# Altium PCB PCB_indheater.pcbdoc
Units mm, origin at the board's own origin, x right, y up, seen from the top; angles counter-clockwise.
Board outline 147.07 x 84.33 mm, 2 copper layers (Top Layer, Bottom Layer); 31 components, 12 nets, 68 pads, 7 vias.
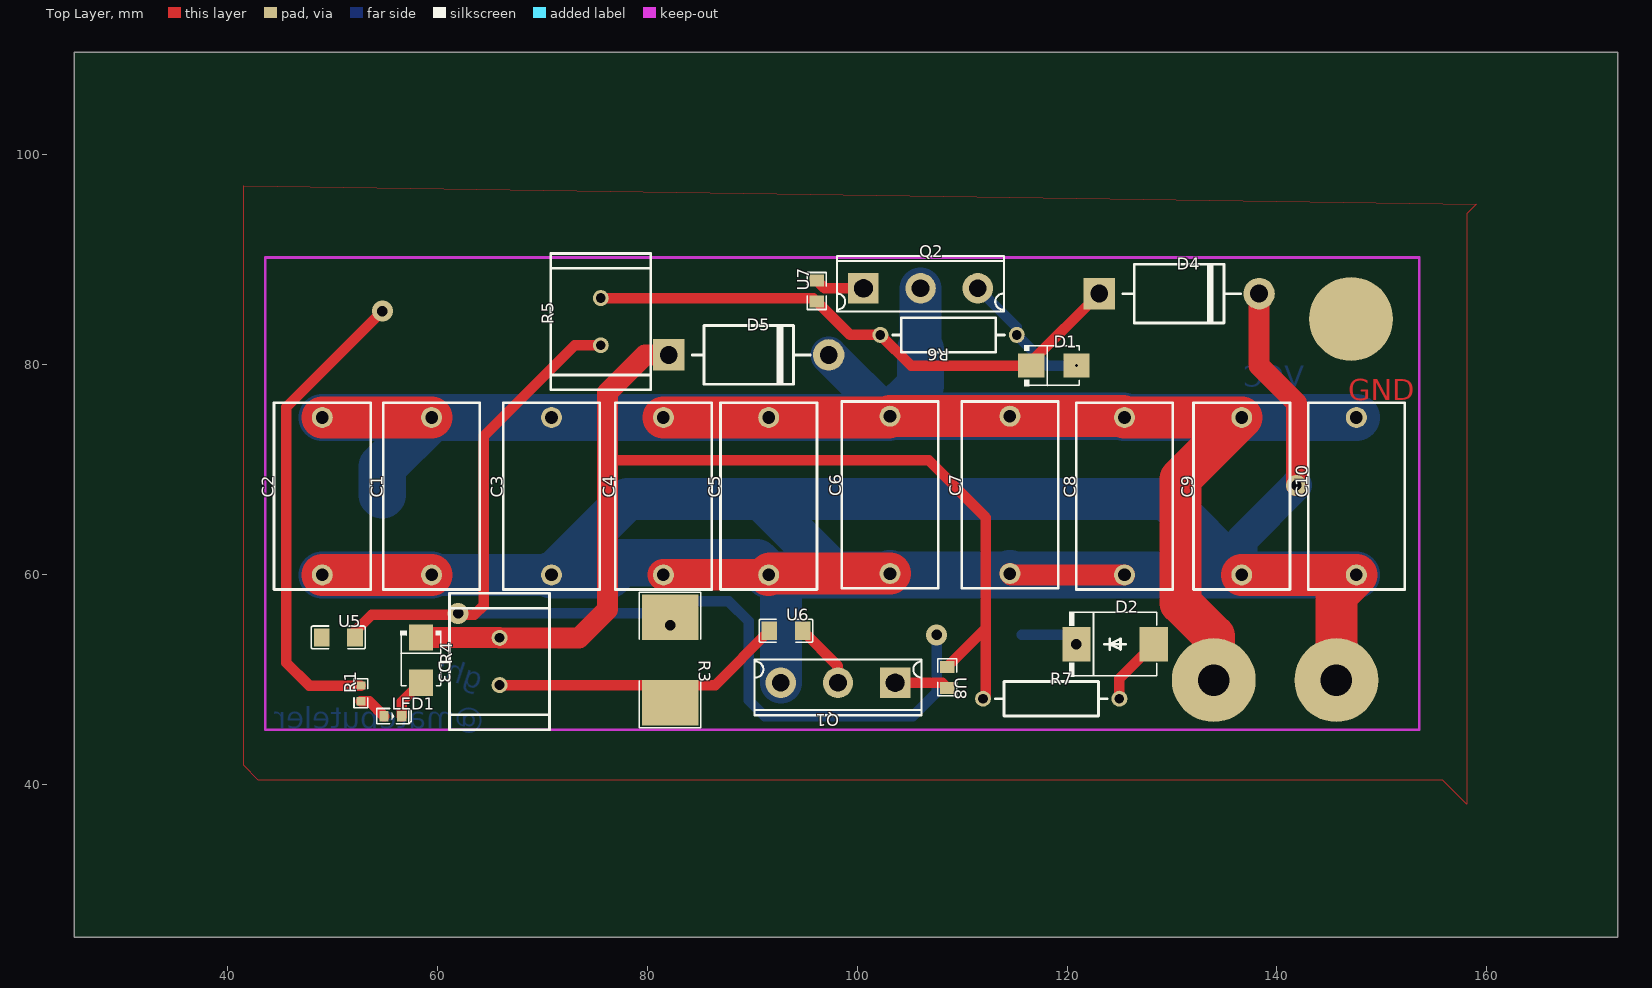
[diagram p0: Top Layer view]
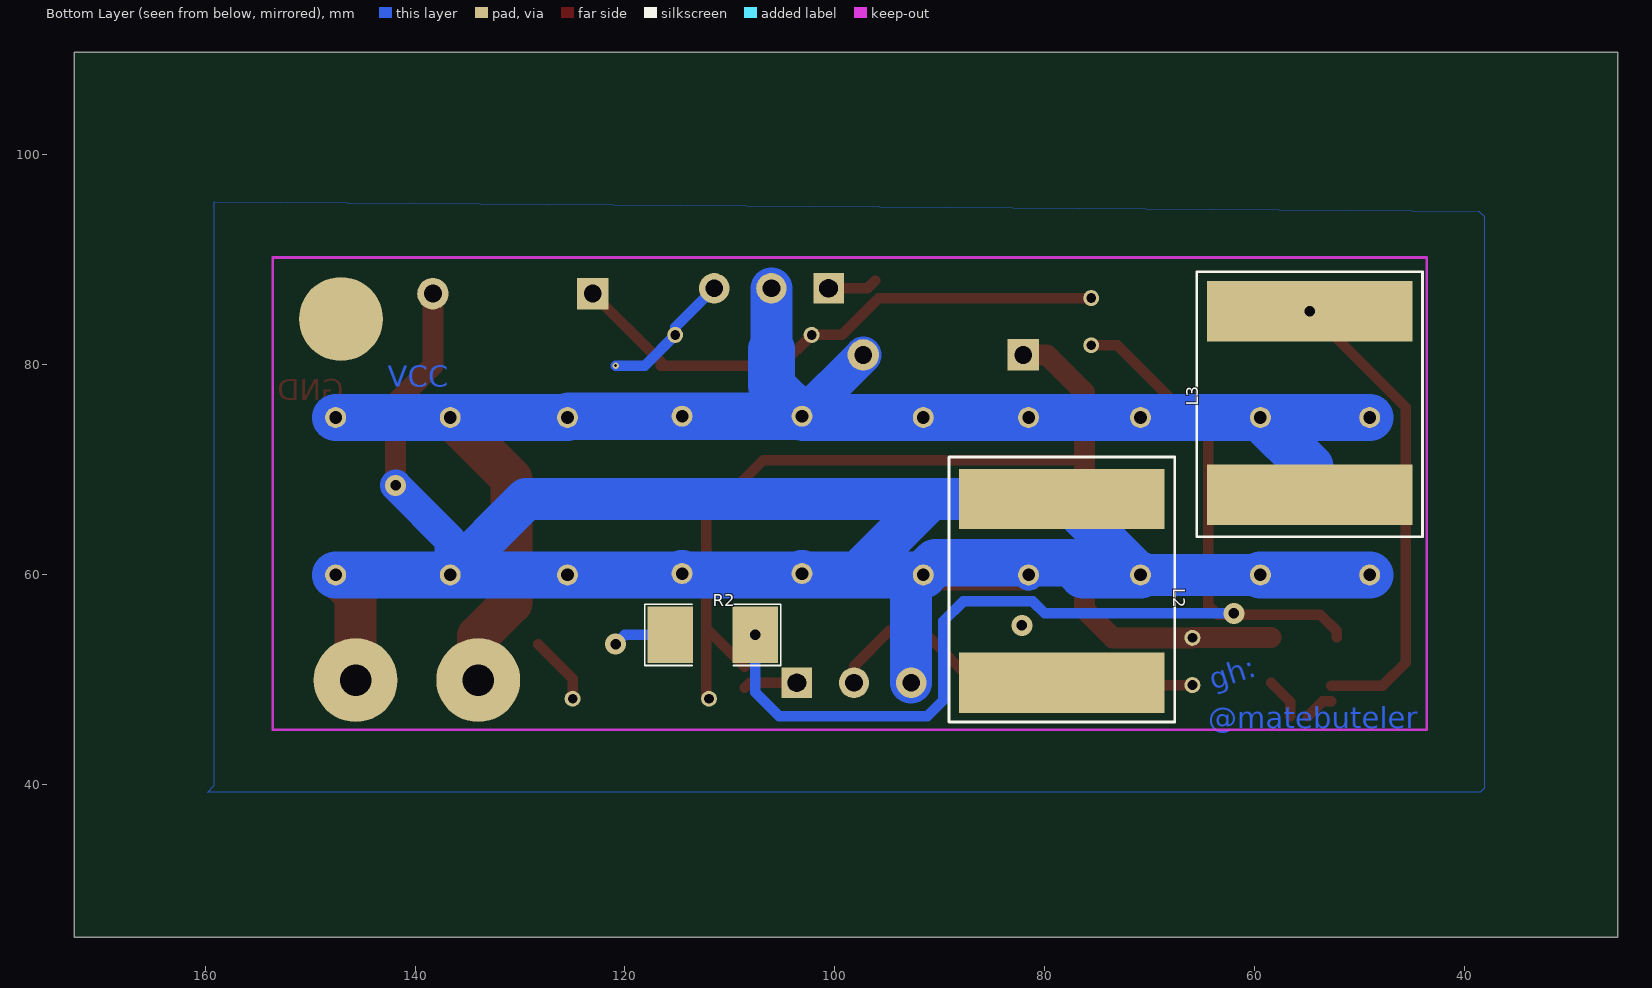
[diagram p1: Bottom Layer view, seen from below]

## Layer stack, top to bottom
Top Layer: signal copper (thickness not stored)
Dielectric: dielectric 0.32, FR-4, Dk 4.8
Bottom Layer: signal copper (thickness not stored)

## Board outline
172.466,25.4 25.4,25.4 25.4,109.728 172.466,109.728

## Components (designator, comment, footprint, x,y, rotation, side; value= is the part's Value field where it differs from the comment)
C1 "470n" CAP-TH_L17.8-W9.2-P15.00-D0.8 59.436,67.437 r90 top
C2 "470n" CAP-TH_L17.8-W9.2-P15.00-D0.8 49.022,67.437 r90 top
C3 "470n" CAP-TH_L17.8-W9.2-P15.00-D0.8 70.866,67.437 r90 top
C4 "470n" CAP-TH_L17.8-W9.2-P15.00-D0.8 81.534,67.437 r90 top
C5 "470n" CAP-TH_L17.8-W9.2-P15.00-D0.8 91.567,67.437 r90 top
C6 "470n" CAP-TH_L17.8-W9.2-P15.00-D0.8 103.124,67.564 r90 top
C7 "470n" CAP-TH_L17.8-W9.2-P15.00-D0.8 114.554,67.564 r90 top
C8 "470n" CAP-TH_L17.8-W9.2-P15.00-D0.8 125.476,67.437 r90 top
C9 "470n" CAP-TH_L17.8-W9.2-P15.00-D0.8 136.652,67.437 r90 top
C10 "470n" CAP-TH_L17.8-W9.2-P15.00-D0.8 147.574,67.437 r90 top
D1 "SMBJ5349B" SMB_L4.3-W3.6-LS5.2-RD 118.745,79.883 r0 top
D2 "MB510_R1_00001" SMC_L6.9-W5.9-LS7.9-RD 124.587,53.34 r0 top
D3 "SMBJ5349B" SMB_L4.3-W3.6-LS5.2-RD 58.42,51.816 r270 top
D4 "FR307_C140432" DO-201AD_BD5.3-L8.4-P12.50-D1.4-FD 130.683,86.741 r0 top
D5 "FR307_C140432" DO-201AD_BD5.3-L8.4-P12.50-D1.4-FD 89.662,80.899 r0 top
L2 "FXL2213-101-M 100uH" FXL2213-101-M 78.359,58.42 r90 bottom
L3 "FXL2213-101-M 100uH" FXL2213-101-M 54.737,76.327 r270 bottom
LED1 "LED-0603_R" LED0603_RED 55.753,46.482 r0 top
Q1 "IRFP4668PBF" TO-247AC-3_L15.8-W5.0-P5.46-L 98.171,49.657 r180 top
Q2 "IRFP4668PBF" TO-247AC-3_L15.8-W5.0-P5.46-L 106.045,87.249 r0 top
R1 "4.7k" R0603 52.705,48.641 r90 top
R2 "47Ω" RES-SMD_L11.0-W5.0#1 111.633,54.229 r0 bottom
R3 "47Ω" RES-SMD_L11.0-W5.0#2 82.169,51.816 r270 top
R4 "470Ω" RES-TH_L13.0-W9.5-P4.50-D1.0 65.913,51.689 r90 top
R5 "470Ω" RES-TH_L13.0-W9.5-P4.50-D1.0 75.565,84.074 r90 top
R6 "10kΩ" RES-TH_BD3.3-L9.0-P13.00-D0.6 108.712,82.804 r180 top
R7 "10kΩ" RES-TH_BD3.3-L9.0-P13.00-D0.6 118.491,48.133 r0 top
U5 "2.2uF" C1206 50.546,53.975 r0 top
U6 "2.2uF" C1206 93.218,54.61 r0 top
U7 "18Ω" R0805 96.139,86.995 r90 top
U8 "18Ω" R0805 108.585,50.165 r270 top

## Footprints (in the part's own frame and the unit in brackets; to place one, negate y for a bottom-side part, rotate by r counter-clockwise, add the part's x,y. Pads: shape width x height; smd on the part's side, far side on the other; paste and mask are expansions set on the pad)
C1206 [mm]
  rect 1.485x1.728 smd paste-100 mask+0.051: 1(-1.593,0) 2(1.593,0)
  silkscreen extent -2.56,-1.09 2.56,1.09
CAP-TH_L17.8-W9.2-P15.00-D0.8 [mm]
  round 2 hole 1.2 paste+0 mask+0.051: 1(-7.5,0) 2(7.5,0)
  silkscreen extent -8.9,-4.6 8.9,4.6
DO-201AD_BD5.3-L8.4-P12.50-D1.4-FD [mm]
  rect 3x3 hole 1.7 paste+0 mask+0.051: 1(-7.62,0)
  round 3 hole 1.7 paste+0 mask+0.051: 2(7.62,0)
  silkscreen extent -5.39,-2.8 5.87,2.8
FXL2213-101-M [mm]
  rect 5.75x19.6 smd paste+0 mask+0.051: 1(-8.75,0) 2(8.75,0)
  silkscreen extent -12.5,-10.75 12.75,10.75
LED0603_RED [mm]
  rect 0.9x1 smd paste+0 mask+0.051: 1(-0.85,0) 2(0.85,0)
  silkscreen extent -1.54,-0.73 1.75,0.73
R0603 [mm]
  rect 0.806x0.864 smd paste-100 mask+0.051: 1(-0.753,0) 2(0.753,0)
  silkscreen extent -1.39,-0.66 1.39,0.66
R0805 [mm]
  rect 1.133x1.377 smd paste-100 mask+0.051: 1(-1,0) 2(1,0)
  silkscreen extent -1.76,-0.92 1.76,0.92
RES-SMD_L11.0-W5.0#1 [mm]
  rect 4.335x5.4 smd paste+0 mask+0.051: 1(4.067,0) 2(-4.068,0)
  silkscreen extent -6.46,-2.93 6.46,2.93
RES-SMD_L11.0-W5.0#2 [mm]
  rect 4.335x5.4 smd paste+0 mask+0.051: 1(-4.067,0) 2(4.068,0)
  silkscreen extent -6.46,-2.93 6.46,2.93
RES-TH_BD3.3-L9.0-P13.00-D0.6 [mil]
  round 60 hole 36 paste+0 mask+2: 1(-255.91,0) 2(255.9,0)
  silkscreen extent -210,-65 210,65
RES-TH_L13.0-W9.5-P4.50-D1.0 [mil]
  round 60 hole 36 paste+0 mask+2: 1(-88.58,0) 2(88.58,0)
  silkscreen extent -256,-188 256,188
SMB_L4.3-W3.6-LS5.2-RD [mm]
  rect 2.5x2.3 smd paste+0 mask+0.051: 1(-2.15,0) 2(2.15,0)
  silkscreen extent -2.81,-1.96 2.43,1.95
SMC_L6.9-W5.9-LS7.9-RD [mm]
  rect 2.7x3.3 smd paste+0 mask+0.051: 1(-3.686,0) 2(3.686,0)
  silkscreen extent -4.36,-3.1 3.98,3.1
TO-247AC-3_L15.8-W5.0-P5.46-L [mm]
  rect 2.9x2.9 hole 1.7 slot 1.785 at 0 deg paste+0 mask+0.051: 1(-5.449,0)
  round 2.9 hole 1.7 paste+0 mask+0.051: 2(0,0) 3(5.45,0)
  silkscreen extent -7.95,-2.2 7.95,3.1

## Free pads (board coordinates)
  round 8 hole 3 paste+0 mask+0.051: 1(133.985,49.911) 1(145.669,49.911)
  round 8 smd paste+0.102 mask+0.051: 2(147.066,84.328)
  round 8 smd far side paste+0.102 mask+0.051: 3(147.066,84.328)

## Via types
v1: diameter 2, hole 1, Top Layer to Bottom Layer, tented both sides, 6 vias
v2: diameter 0.62, hole 0.31, Top Layer to Bottom Layer, tented both sides, 1 vias

## Nets (pads, with @x,y where several pads share a name; then routed paths per layer and width w, separated by ;. In a path a pad name is that pad's centre, name@x,y a point inside that pad or via, vN(x,y) a via of type N, cw(c..) or ccw(c..) an arc to the next point about the centre after c; other vN are vias at no path point)
D1_1: D1.1 D4.1 R5.2 R6.2 U7.1 | length 53.2
  Top Layer w1: R5.2 95.81,86.324 U7.1 99.33,82.804 R6.2 105.133,79.883 D1.1 116.595,80.273 D4.1
GND: D1.2 D2.2 D3.2 LED1.2 pad.2 Q1.2 Q2.3 R6.1 R7.2 U5.1 U6.2 | length 29.7
  Top Layer w1: LED1.2 56.603,47.849 D3.2 ; U6.2 98.171,51.25 Q1.2 ; R7.2 124.991,50.058 D2.2
  Bottom Layer w1: Q2.3 115.212,83.532 R6.1 118.133,79.883 v2(120.894,79.883)
Q1_1: Q1.1 U8.2 | length 5.2
  Top Layer w1: Q1.1@103.621,49.657 108.093,49.657 U8.2
Q1_3: C1.1 C2.1 C3.1 C4.1 C5.1 C6.1 C7.1 C8.1 C9.1 C10.1 D4.2 L2.2 pad.1@145.669,49.911 Q1.3 | length 302.1
  Top Layer w1: v1@141.859,67.945 v1(141.859,68.458)
  Top Layer w2: C7.1 114.681,59.937 C8.1 ; D4.2 138.303,79.883 141.859,76.327 v1(141.859,68.458)
  Top Layer w3: C4.1 C5.1
  Top Layer w4: C2.1 C1.1 ; C5.1 91.694,60.064 C6.1 ; C9.1 C10.1 145.669,58.031 pad.1@145.669,49.911
  Bottom Layer w3: C4.1 81.534,61.087 ; C9.1 136.652,63.251 v1(141.859,68.458)
  Bottom Layer w4: C1.1 C3.1 78.099,67.17 L2.2 ; C5.1 92.721,58.783 Q1.3 ; 98.076,59.937 90.843,67.17 L2.2 ; C9.1 129.419,67.17 L2.2
  Bottom Layer w4.5: C2.1 C1.1 ; C3.1 76.319,59.936 77.47,61.087 90.416,61.087 C5.1 103.124,59.937 C6.1 ; C6.1@102.997,59.937 C7.1@114.427,59.937 ; C7.1 C7.1@114.427,59.937 ; C10.1 C9.1 C8.1 C7.1@114.427,59.937
Q2_1: Q2.1 U7.2 | length 4.8
  Top Layer w1: U7.2 96.885,87.249 Q2.1@100.595,87.249
Q2_2: C1.2 C2.2 C3.2 C4.2 C5.2 C6.2 C7.2 C8.2 C9.2 C10.2 D5.2 L3.2 pad.1@133.985,49.911 Q2.2 | length 224
  Top Layer w4: C2.2 C1.2 ; C4.2 102.997,74.937 C6.2 125.349,75.064 C8.2 C9.2 ; pad.1@133.985,49.911 133.985,54.102 130.81,57.277 130.81,69.096 C9.2
  Bottom Layer w3.5: D5.2 C6.2
  Bottom Layer w4: 106.045,81.414 Q2.2
  Bottom Layer w4.5: C2.2 C1.2 ; L3.2 54.737,70.238 C1.2 ; C6.2 106.045,77.986 106.045,81.415 ; C10.2 C9.2 C8.2 125.349,75.064 C7.2 C6.2 102.997,74.937 C5.2 C4.2 C3.2 C1.2
R1_1: LED1.1 R1.1 | length 2.8
  Top Layer w1: R1.1 53.497,47.888 LED1.1
R7_1: D3.1 D5.1 R4.2 R7.1 U8.1 | length 107.8
  Top Layer w1: 76.2,70.854 106.819,70.854 112.268,65.405 112.268,54.848 ; U8.1 112.268,54.848 ; R7.1 112.268,48.41 112.268,54.848
  Top Layer w2: D3.1 65.886,53.966 R4.2 73.497,53.939 76.2,56.642 76.2,77.343 79.756,80.899 D5.1
S$171: 
U5_2: R2.2 R5.1 U5.2 | length 106.1
  Top Layer w1: U5.2 52.139,54.552 53.721,56.134 63.5,56.134 64.389,57.023 64.389,73.152 73.061,81.824 R5.1
  Bottom Layer w1: v1(61.976,56.261) 80.01,56.261 81.153,57.404 87.757,57.404 89.662,55.499 89.662,48.006 91.186,46.482 105.283,46.482 107.566,48.765 v1(107.565,54.229)
U6_1: R3.2 R4.1 U6.1 | length 27.9
  Top Layer w1: R4.1 86.454,49.439 U6.1
VCC: D2.1 L2.1 L3.1 pad.3 R1.2 R2.1 R3.1 | length 50.9
  Top Layer w1: R1.2 47.761,49.394 45.593,51.562 45.593,75.933 v1(54.737,85.077)
  Bottom Layer w1: R2.1 120.012,54.229 v1(120.901,53.34)
  other v1: 82.169,55.118

## Polygon pours and split planes (outlines as drawn)
GND on Top Layer (solid): 159.004,95.25 158.115,94.361 158.115,38.1 155.829,40.386 42.926,40.386 41.529,41.783 41.529,97.028
VCC on Bottom Layer (solid): 38.608,94.615 38.1,94.107 38.1,39.624 38.481,39.243 159.766,39.243 159.131,39.878 159.131,95.504

## Other copper
Top Layer:
  text "GND" at 146.812,76.581 h2.03
Bottom Layer:
  text "VCC" at 142.621,77.851 h2.03
  text "gh:" at 63.948,48.945 h2.03 r342
  text "@matebuteler" at 64.389,45.339 h2.03